# EAGLE board Ninaboards (EAGLE 5.11)
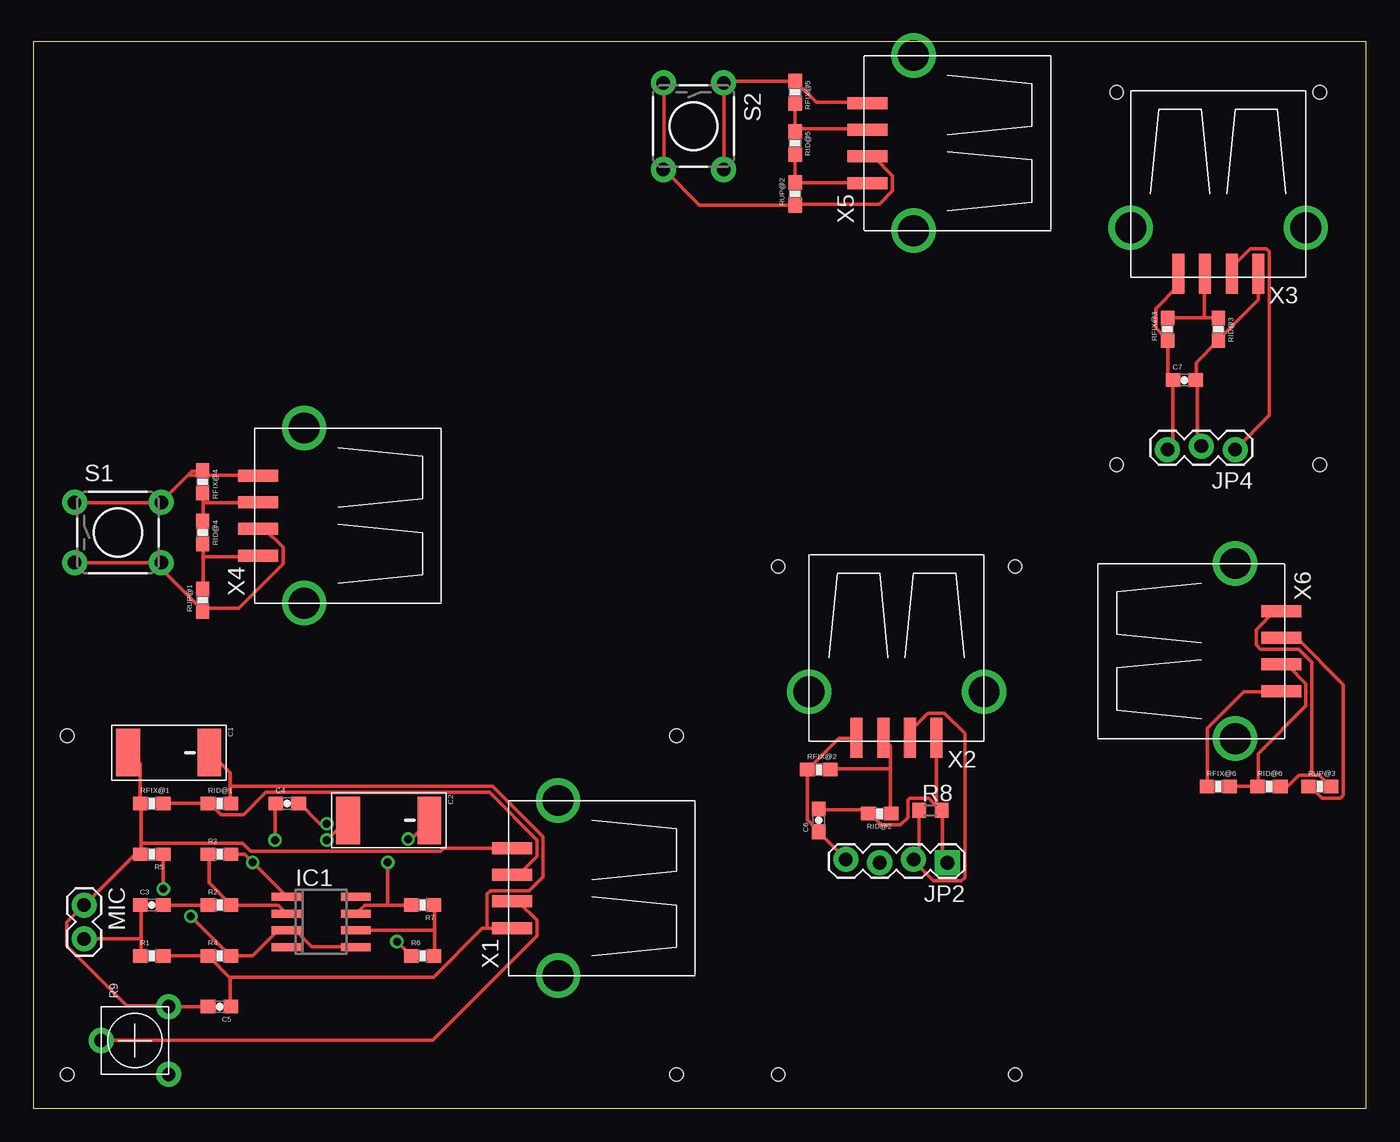
[diagram p0: board, top side]
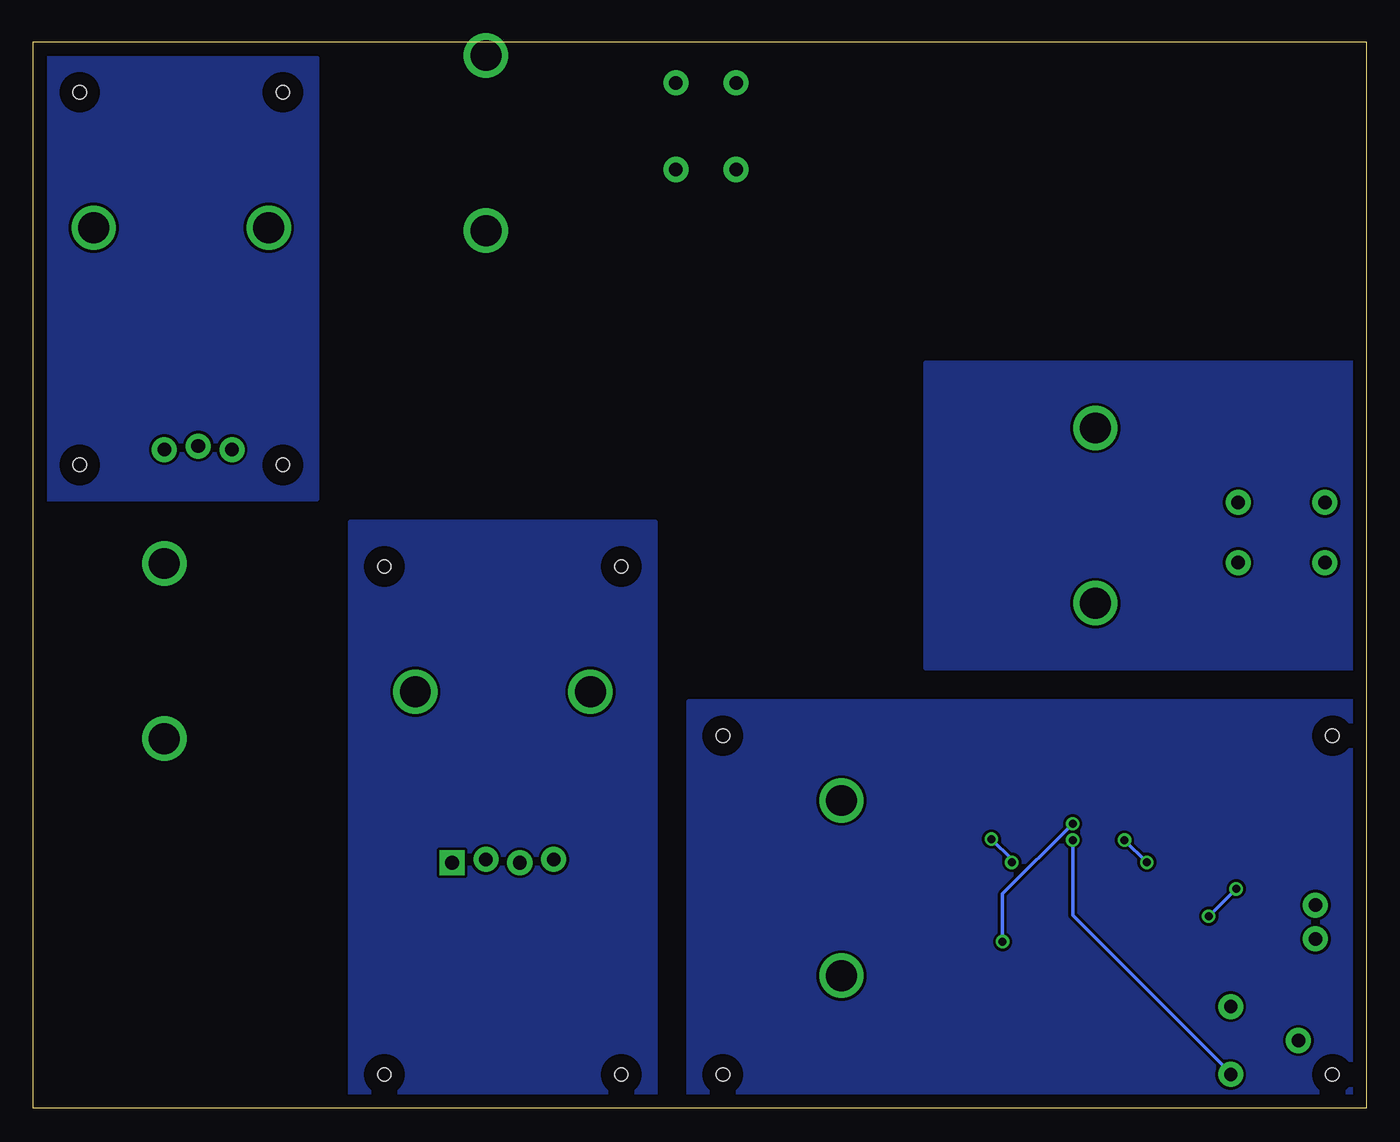
[diagram p1: board, bottom side, seen from below]

Size 100 x 80 mm. Coordinates in mm from the lower left corner, seen from the top.
Outline: 0,0 100,0 100,80 0,80 0,0
Copper layers (1*16): Top 0.035mm / dielectric 1.5mm / Bottom 0.035mm
Design rules "default": minimum track width 10mil, minimum drill 0.6mm, track to track 8mil, track to pad 8mil, pad to pad 8mil, via to via 8mil, smd to smd 8mil, copper to edge 40mil, drill to drill 8mil, minimum pad ring 10mil, minimum via ring 8mil, stop-mask expansion 4mil, vias tented up to drill 0mil, thermal gap 10mil
Holes 1 mm at 48.26,27.94 48.26,2.54 2.54,2.54 2.54,27.94 55.88,40.64 73.66,40.64 73.66,2.54 55.88,2.54 81.28,76.2 96.52,76.2 96.52,48.26 81.28,48.26

## Footprints (pad centres in the part's own frame; a part is rotated, then mirrored left to right if it is on the bottom)
VISHAY_C = smd 3.556 x 1.778: + 0,3.048; - 0,-3.048
0603-CAP = smd 1.1 x 1: 1 -0.85,0; 2 0.85,0
SO08 = smd 0.6 x 2.2: 1 -1.905,-2.6; 2 -0.635,-2.6; 3 0.635,-2.6; 4 1.905,-2.6; 5 1.905,2.6; 6 0.635,2.6; 7 -0.635,2.6; 8 -1.905,2.6
1X04_LOCK = drill 1.016 pad 1.88 square: 1 0,0.127 | drill 1.016 pad 1.88 round: 2 2.54,-0.127; 3 5.08,0.127; 4 7.62,-0.127
1X03_LOCK = drill 1.016 pad 1.88 round: 1 0,0.127; 2 2.54,-0.127; 3 5.08,0.127
1X02 = drill 1.016 pad 1.88 round: 1 0,0; 2 2.54,0
0603-RES = smd 1.1 x 1: 1 -0.85,0; 2 0.85,0
R0603 = smd 1 x 1.1: 1 -0.85,0; 2 0.85,0
TRIM_POT_PTH = drill 1 pad 1.88 round: 1 -2.54,-2.54; 2 0,2.54; 3 2.54,-2.54
TACTILE-PTH = drill 1.016 pad 1.88 round: 1 -3.251,2.261; 2 3.251,2.261; 3 -3.251,-2.261; 4 3.251,-2.261
USB-A-S = smd 3 x 0.9: D+ 3.45,-1; D- 3.45,1; GND 3.45,-3; VBUS 3.45,3 | drill 2.311 round: P$5 0,-6.566; P$6 0,6.566

## Placement (x,y rotation side)
C1  4.7uF  [VISHAY_C]  10.16,26.67 270 top
C2  4.7uF  [VISHAY_C]  26.67,21.59 270 top
C3  104p  [0603-CAP]  8.89,15.24 0 top
C4  104p  [0603-CAP]  19.05,22.86 0 top
C5  104p  [0603-CAP]  13.97,7.62 180 top
C6  100nF  [0603-CAP]  58.93,21.59 90 top
C7  100nF  [0603-CAP]  86.36,54.61 0 top
IC1  LM358D  [SO08]  21.59,13.97 270 top
JP2  [1X04_LOCK]  68.58,18.54 180 top
JP4  [1X03_LOCK]  90.17,49.53 180 top
MIC  [1X02]  3.81,15.24 270 top
R1  10k  [0603-RES]  8.89,11.43 0 top
R2  1k  [0603-RES]  13.97,15.24 0 top
R3  10k  [0603-RES]  13.97,19.05 0 top
R4  10k  [0603-RES]  13.97,11.43 0 top
R5  10k  [0603-RES]  8.89,19.05 180 top
R6  1K  [0603-RES]  29.21,11.43 0 top
R7  10k  [0603-RES]  29.21,15.24 180 top
R8  [R0603]  67.31,22.35 0 top
R9  TRIMPOTPTH  [TRIM_POT_PTH]  7.62,5.08 90 top
RFIX@1  1K  [0603-RES]  8.89,22.86 0 top
RFIX@2  1K  [0603-RES]  58.93,25.4 0 top
RFIX@3  1K  [0603-RES]  85.09,58.42 90 top
RFIX@4  1K  [0603-RES]  12.7,46.99 270 top
RFIX@5  1K  [0603-RES]  57.15,76.2 270 top
RFIX@6  1K  [0603-RES]  88.9,24.13 0 top
RID@1  10K  [0603-RES]  13.97,22.86 0 top
RID@2  10K  [0603-RES]  63.5,22.1 180 top
RID@3  10K  [0603-RES]  88.9,58.42 270 top
RID@4  10K  [0603-RES]  12.7,43.18 270 top
RID@5  10K  [0603-RES]  57.15,72.39 270 top
RID@6  10K  [0603-RES]  92.71,24.13 0 top
RUP@1  10K  [0603-RES]  12.7,38.1 90 top
RUP@2  10K  [0603-RES]  57.15,68.58 90 top
RUP@3  10K  [0603-RES]  96.52,24.13 0 top
S1  [TACTILE-PTH]  6.35,43.18 0 top
S2  [TACTILE-PTH]  49.53,73.66 270 top
X1  USB-A-S  [USB-A-S]  39.37,16.51 180 top
X2  USB-A-S  [USB-A-S]  64.77,31.24 270 top
X3  USB-A-S  [USB-A-S]  88.9,66.04 270 top
X4  USB-A-S  [USB-A-S]  20.32,44.45 180 top
X5  USB-A-S  [USB-A-S]  66.04,72.39 180 top
X6  USB-A-S  [USB-A-S]  90.17,34.29 0 top

## Library data of the parts
C1-C7 JP2 JP4 MIC R1-R7 R9 RFIX@1-RFIX@6 RID@1-RID@6 RUP@1-RUP@3 S1 S2 X1-X6 = SparkFun
IC1 = linear
R8 = rcl

## Nets
5V@1: C1.+ C5.1 R1.2 R4.1 RID@1.2 X1.VBUS
5V@2: C6.2 JP2.1 R8.2 RID@2.2 X2.VBUS
5V@3: C7.2 JP4.2 RID@3.2 X3.VBUS
5V@4: RID@4.2 RUP@1.2 X4.VBUS
5V@5: RID@5.2 RUP@2.2 X5.VBUS
5V@6: RID@6.2 RUP@3.2 X6.VBUS
GND@1: C1.- C5.2 MIC.1 R5.2 R9.3 RFIX@1.1 X1.GND
GND@2: C6.1 JP2.4 RFIX@2.1 X2.GND
GND@3: C7.1 JP4.3 RFIX@3.1 X3.GND
GND@4: RFIX@4.1 S1.1 S1.2 X4.GND
GND@5: RFIX@5.1 S2.1 S2.2 X5.GND
GND@6: RFIX@6.1 X6.GND
N$1: IC1.3 IC1.5 R4.2 R5.1
N$2: C3.1 MIC.2 R1.1
N$3: IC1.2 R2.2 R3.1
N$4: RFIX@1.2 RID@1.1 X1.D+
N$5: C4.1 IC1.1 R3.2
N$6: C3.2 R2.1
N$7: C4.2 R6.1
N$8: C2.- R9.1
N$9: IC1.6 R6.2 R7.1
N$10: C2.+ IC1.7 R7.2
N$11: R9.2 X1.D-
N$12: RFIX@3.2 RID@3.1 X3.D+
N$13: RFIX@2.2 RID@2.1 X2.D+
N$14: JP2.2 R8.1 X2.D-
N$15: JP4.1 X3.D-
N$16: RFIX@4.2 RID@4.1 X4.D+
N$17: RUP@1.1 S1.3 S1.4 X4.D-
N$18: RFIX@5.2 RID@5.1 X5.D+
N$19: RUP@2.1 S2.3 S2.4 X5.D-
N$20: RFIX@6.2 RID@6.1 X6.D+
N$21: RUP@3.1 X6.D-
V+: IC1.8
V-: IC1.4

## Tracks (layer width: path | path; a pad name or v marks a point on that pad's centre or on a via)
5V@1
  Top 0.254: 14.78,24.16 14.78,25.15 13.26,26.67 C1.+ | 14.78,24.16 14.78,22.86 RID@1.2 | R1.2 R4.1 13.18,11.35 14.78,9.75 | 14.78,9.75 14.78,7.62 C5.1 | 34.06,13.49 33.68,13.49 30.02,9.83 14.86,9.83 14.78,9.75 | 34.06,13.49 35.89,13.49 X1.VBUS | 14.78,24.16 34.44,24.16 38.25,20.34 38.25,17.37 37.19,16.31 34.29,16.31 34.06,16.08 34.06,13.49
5V@2
  Top 0.254: C6.2 58.98,22.4 62.41,22.4 62.64,22.17 RID@2.2 62.71,22.02 62.87,22.02 63.63,21.26 65.08,21.26 65.61,21.79 65.61,23.09 65.76,23.24 67.21,23.24 68.05,22.4 R8.2 | R8.2 68.2,22.33 68.2,18.82 68.58,18.44 JP2.1 | X2.VBUS 67.74,27.74 67.74,22.86 R8.2
5V@3
  Top 0.254: JP4.2 87.63,49.68 87.33,49.99 87.33,54.56 C7.2 87.25,54.63 87.25,55.93 88.85,57.53 RID@3.2 88.92,57.68 91.9,60.66 91.9,62.56 X3.VBUS
5V@4
  Top 0.254: 12.72,41.38 12.72,42.29 RID@4.2 | 12.72,41.38 12.72,39.01 RUP@1.2 | 12.72,41.38 16.84,41.38 X4.VBUS
5V@5
  Top 0.254: RID@5.2 RUP@2.2 57.23,69.42 62.56,69.42 X5.VBUS
5V@6
  Top 0.254: 95.94,24.99 96.47,24.99 97.31,24.16 RUP@3.2 | 95.94,24.99 94.94,24.99 94.11,24.16 93.57,24.16 RID@6.2 | 95.94,24.99 95.94,33.45 94.94,34.44 92.05,34.44 91.75,34.75 91.75,35.89 93.12,37.26 93.57,37.26 X6.VBUS
GND@1
  Top 0.254: C5.2 R9.3 10.06,7.7 7.01,7.7 2.52,12.19 2.52,13.95 MIC.1 8,19.43 R5.2 8.08,19.05 8.08,19.89 | 8.08,19.89 8.08,22.86 RFIX@1.1 8,22.94 8,25.83 7.16,26.67 C1.- | X1.GND 35.89,19.51 30.79,19.51 30.56,19.28 16.31,19.28 15.7,19.89 8.08,19.89
GND@2
  Top 0.254: JP2.4 58.98,20.65 C6.1 58.9,20.8 58.06,21.64 58.06,25.38 RFIX@2.1 58.14,25.45 60.43,27.74 61.72,27.74 X2.GND
GND@3
  Top 0.254: JP4.3 85.11,49.45 85.5,49.84 85.5,54.48 C7.1 85.5,54.63 85.11,55.02 85.11,57.53 RFIX@3.1 85.04,57.68 84.2,58.52 84.2,59.97 85.88,61.65 85.88,62.56 X3.GND
GND@4
  Top 0.254: 11.66,47.55 9.6,45.49 S1.2 9.53,45.41 3.12,45.41 S1.1 | 11.66,47.55 11.89,47.78 12.65,47.78 RFIX@4.1 | X4.GND 16.84,47.47 11.73,47.47 11.66,47.55
GND@5
  Top 0.254: X5.GND 62.56,75.44 58.75,75.44 57.23,76.96 RFIX@5.1 57.15,77.04 51.89,77.04 51.82,76.96 S2.1 51.82,76.81 51.82,70.41 S2.2
GND@6
  Top 0.254: RFIX@6.1 88.09,24.16 88.09,28.5 90.83,31.24 93.57,31.24 X6.GND
N$1  (via drill 0.6)
  Top 0.254: v9.75,16.46 9.75,19.05 R5.1 | v11.81,14.4 14.78,11.43 R4.2 16.46,11.43 18.36,13.34 IC1.3 19.05,13.26 19.74,13.26 20.88,12.12 24.16,12.12 IC1.5
  Bottom 0.254: v11.81,14.4 v9.75,16.46
N$2
  Top 0.254: 8.08,12.72 8.08,15.24 C3.1 | 8.08,12.72 8.08,11.43 R1.1 | 8.08,12.72 3.81,12.72 MIC.2
N$3
  Top 0.254: IC1.2 18.97,14.63 18.36,15.24 R2.2 14.78,15.32 13.18,16.92 13.18,19.05 R3.1
N$4
  Top 0.254: RFIX@1.2 RID@1.1 13.18,22.78 13.34,22.78 14.1,22.02 15.77,22.02 17.45,23.7 34.21,23.7 37.8,20.12 37.8,18.9 36.42,17.53 35.97,17.53 X1.D+
N$5  (via drill 0.6)
  Top 0.254: R3.2 15.85,19.05 v16.46,18.44 18.97,15.93 IC1.1 | v18.14,20.12 18.14,22.86 C4.1
  Bottom 0.254: v16.46,18.44 v18.14,20.12
N$6
  Top 0.254: C3.2 R2.1
N$7  (via drill 0.6)
  Top 0.254: v27.28,12.5 28.35,11.43 R6.1 | v22.02,21.34 21.49,21.34 19.96,22.86 C4.2
  Bottom 0.254: v27.28,12.5 27.28,16.08 v22.02,21.34
N$8  (via drill 0.6)
  Top 0.254: v22.02,20.12 23.47,21.57 23.62,21.57 C2.-
  Bottom 0.254: v22.02,20.12 22.02,14.48 10.13,2.59 R9.1
N$9
  Top 0.254: 30.1,13.34 30.1,15.24 R7.1 | 30.1,13.34 30.1,11.43 R6.2 | IC1.6 30.1,13.34
N$10  (via drill 0.6)
  Top 0.254: 26.59,15.24 24.84,15.24 24.23,14.63 IC1.7 | 26.59,15.24 R7.2 | v28.12,20.19 28.35,20.19 29.72,21.57 C2.+ | 26.59,15.24 v26.59,18.44
  Bottom 0.254: v26.59,18.44 26.59,18.67 v28.12,20.19
N$11
  Top 0.254: X1.D- 35.97,15.47 36.42,15.47 37.8,14.1 37.8,12.95 29.95,5.11 5.11,5.11 R9.2
N$12
  Top 0.254: 87.86,59.28 88.85,59.28 RID@3.1 | 87.86,59.28 85.11,59.28 RFIX@3.2 | 87.86,59.28 87.86,62.56 X3.D+
N$13
  Top 0.254: 64.31,25.45 64.31,27.2 63.78,27.74 X2.D+ | 64.31,25.45 64.31,22.17 RID@2.1 | RFIX@2.2 59.82,25.45 64.31,25.45
N$14
  Top 0.254: R8.1 66.45,22.33 66.45,19.05 66.06,18.67 JP2.2 65.99,18.59 67.51,17.07 69.65,17.07 69.88,17.3 69.88,28.12 68.35,29.64 67.13,29.64 65.84,28.35 65.84,27.81 X2.D-
N$15
  Top 0.254: X3.D- 89.92,62.64 89.92,63.09 91.29,64.47 92.51,64.47 92.73,64.24 92.73,51.97 JP4.1
N$16
  Top 0.254: 12.72,45.41 12.72,46.1 RFIX@4.2 | 12.72,45.41 12.72,44.04 RID@4.1 | 12.72,45.41 16.84,45.41 X4.D+
N$17
  Top 0.254: X4.D- 16.92,43.43 17.37,43.43 18.75,42.06 18.75,40.84 15.39,37.49 12.72,37.49 RUP@1.1 12.65,37.26 12.65,37.41 9.6,40.46 S1.4 S1.3
N$18
  Top 0.254: RFIX@5.2 RID@5.1 57.23,73.46 62.56,73.46 X5.D+
N$19
  Top 0.254: X5.D- 62.64,71.32 63.09,71.32 64.47,69.95 64.47,68.81 63.48,67.82 57.23,67.82 RUP@2.1 57.15,67.74 49.99,67.74 47.32,70.41 S2.4 47.32,70.48 47.32,76.89 S2.3
N$20
  Top 0.254: RFIX@6.2 89.76,24.16 91.82,24.16 RID@6.1 91.9,24.23 91.9,26.59 95.48,30.18 95.48,31.85 94.11,33.22 93.65,33.22 X6.D+
N$21
  Top 0.254: RUP@3.1 95.71,24.08 95.86,24.08 96.7,23.24 98.07,23.24 98.3,23.47 98.3,31.77 94.79,35.28 93.65,35.28 X6.D-
N$22
  pour Bottom: 0,30.48 50.8,30.48 50.8,0 0,0
N$23
  pour Bottom: 53.34,43.94 76.2,43.94 76.2,0 53.34,0
N$24
  pour Bottom: 78.74,78.74 99.06,78.74 99.06,45.72 78.74,45.72
N$25
  pour Bottom: 0,33.02 33.02,33.02 33.02,55.88 0,55.88

## Text on the board
tDocu: Pushbutton | PIR Sensor | Humidity Sensor | Sound Sensor